# Altium PCB main.PcbDoc
Units mm, origin at the board's own origin, x right, y up, seen from the top; angles counter-clockwise.
Board outline 40.73 x 35.43 mm, 4 copper layers (Top Layer, POWER, GND, Bottom Layer), stack 0.603 mm thick; 29 components, 23 nets, 113 pads, 10 vias.
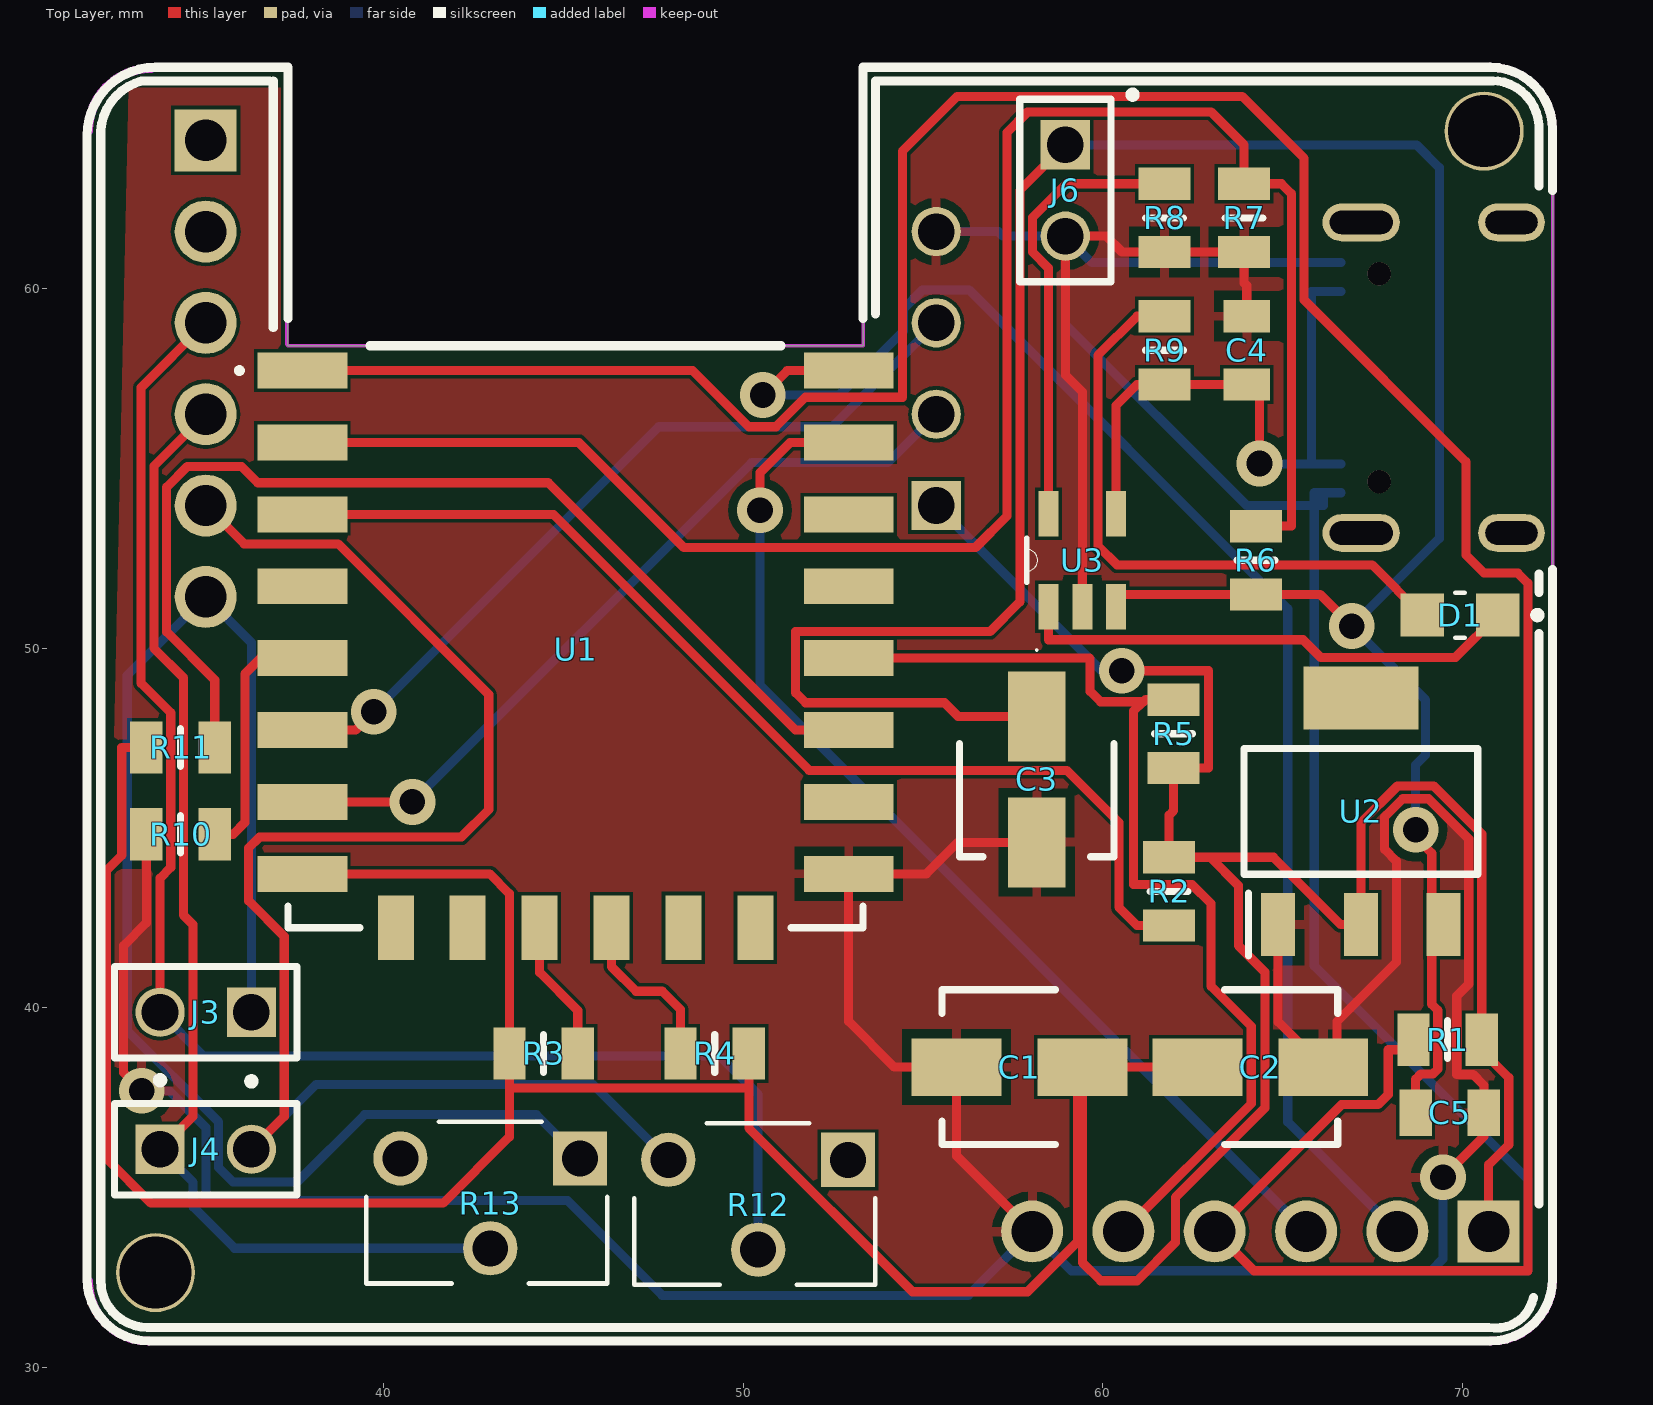
[diagram p0: Top Layer view]
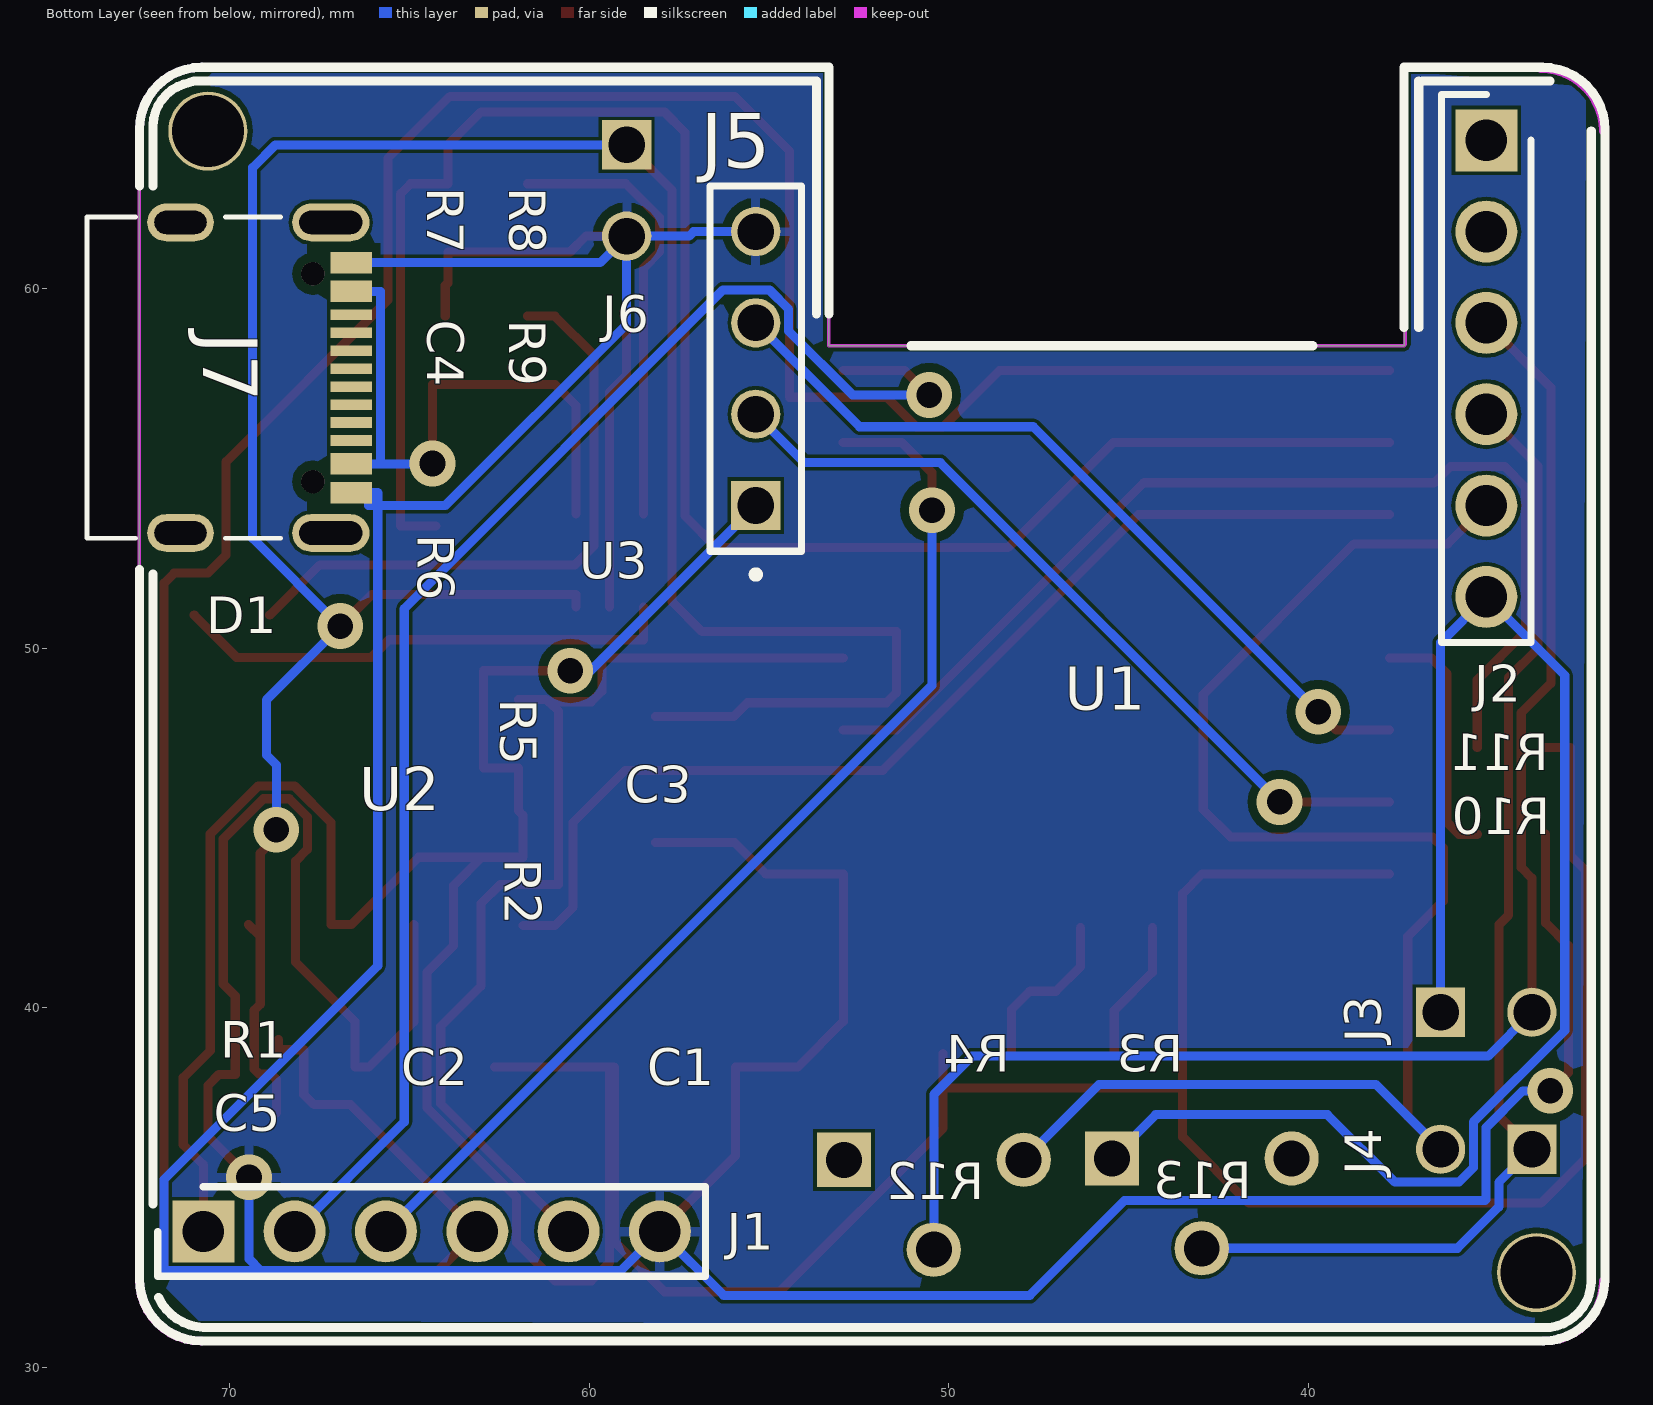
[diagram p1: Bottom Layer view, seen from below]
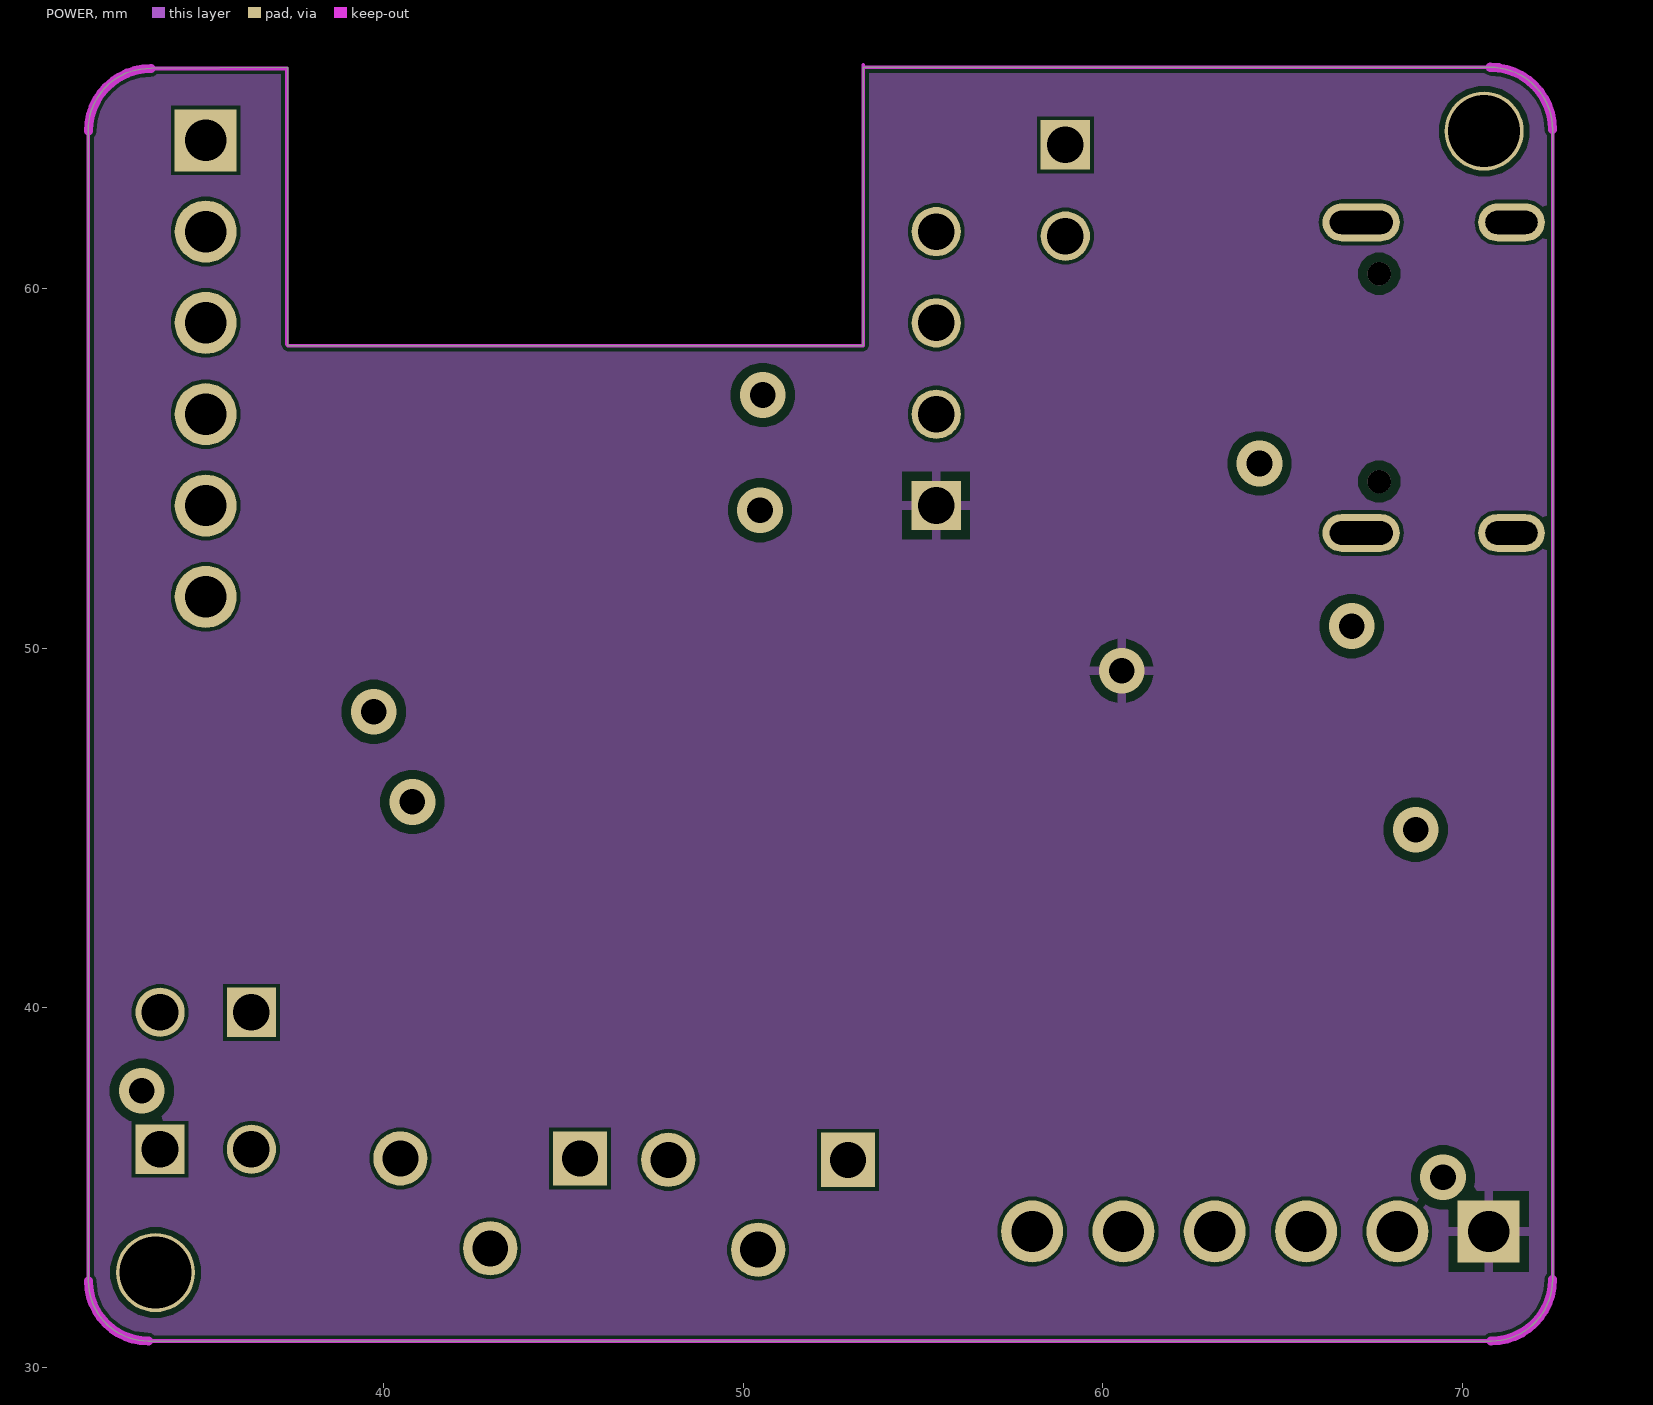
[diagram p2: POWER]
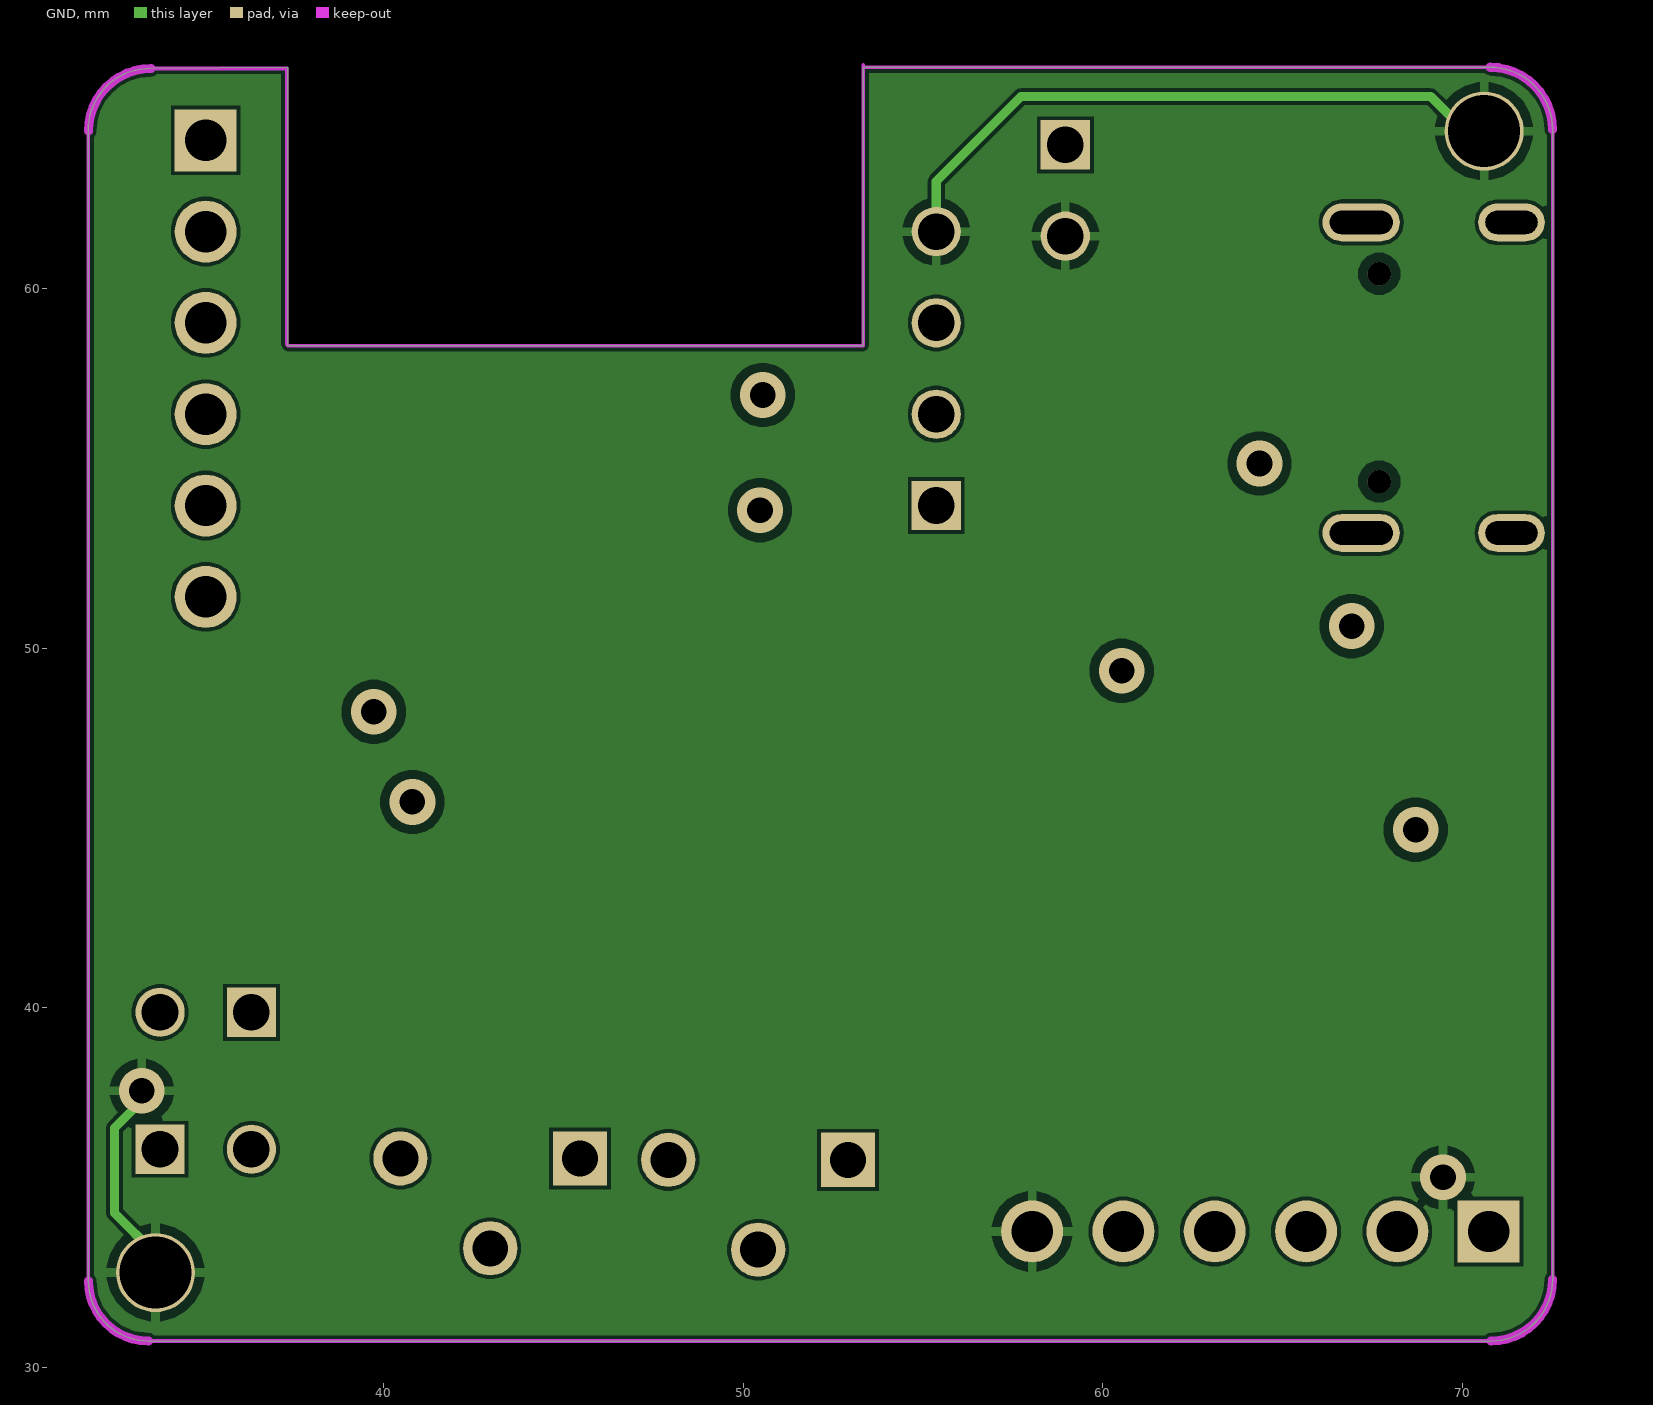
[diagram p3: GND]
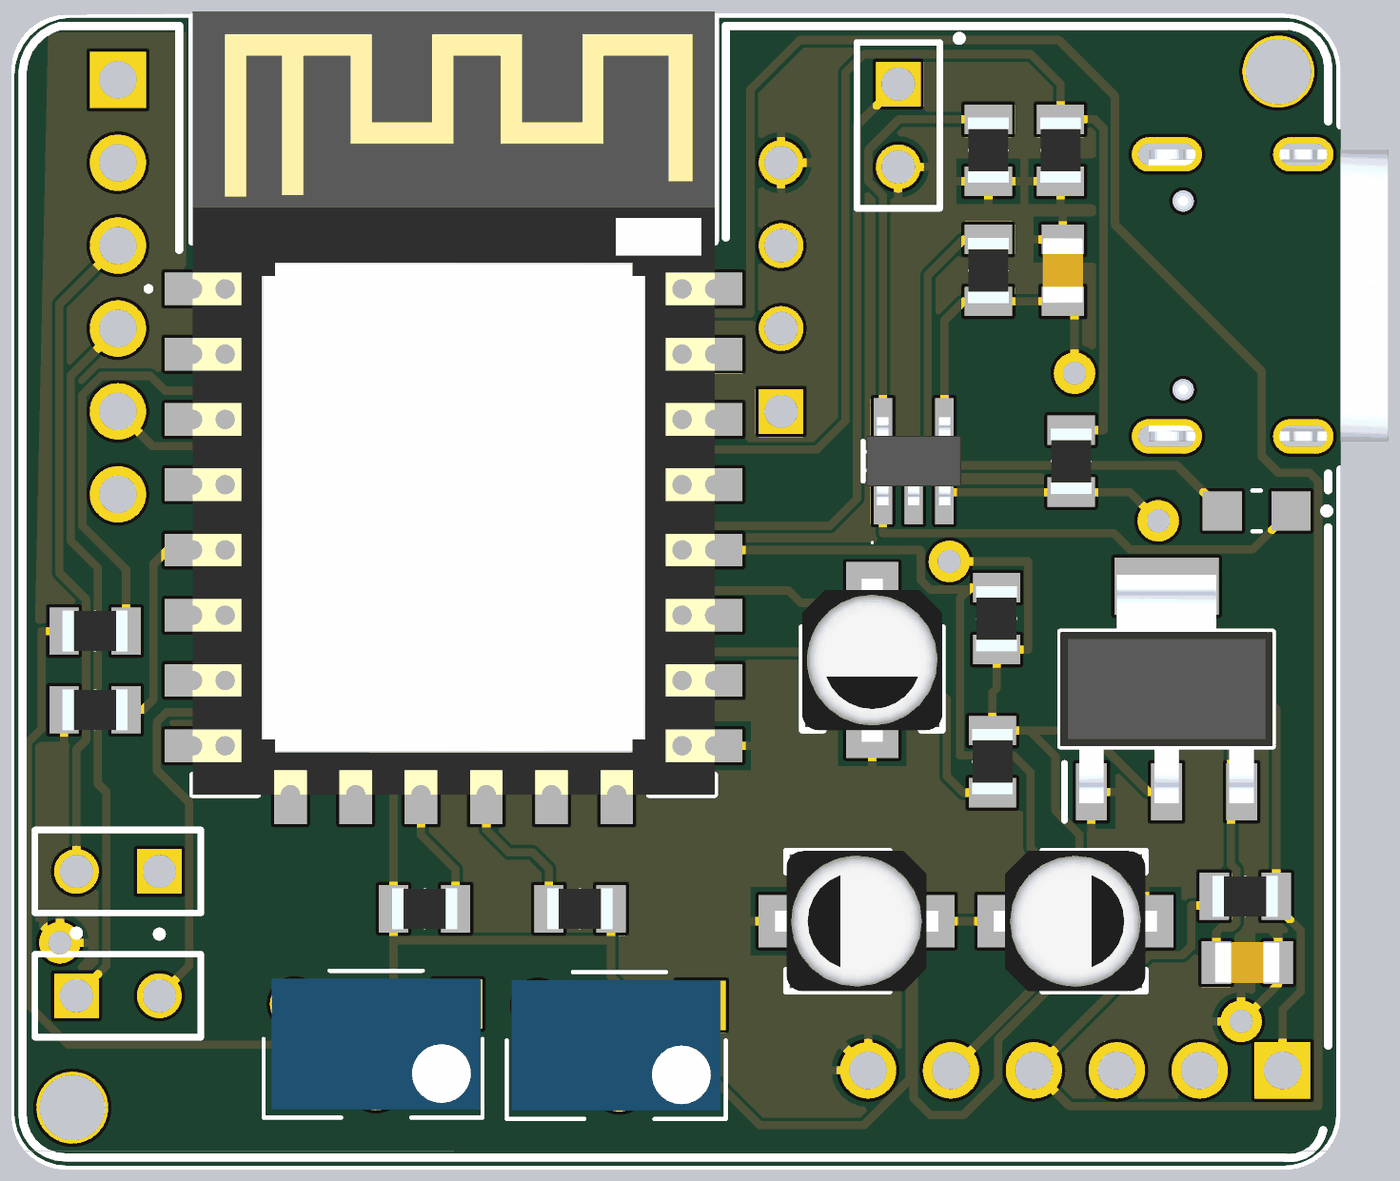
[diagram p4: 3D render of the assembled board from above, using the file's embedded part models]

## Layer stack, top to bottom
Top Solder: solder mask 0.0102, Solder Resist, Dk 3.5
Top Layer: signal copper 0.0356
Dielectric 2: prepreg 0.0711, PP-006, Dk 4.1
POWER: signal copper 0.035
Dielectric 1: dielectric 0.32, FR-4, Dk 4.8
GND: signal copper 0.035
Dielectric 3: prepreg 0.0711, PP-006, Dk 4.1
Bottom Layer: signal copper 0.0356
Bottom Solder: solder mask 0.0102, Solder Resist, Dk 3.5

## Board outline
31.787,32.405 31.787,64.389 cw(c33.488,64.431) 33.53,66.132 37.338,66.167 37.338,58.42 53.34,58.42 53.34,66.167 70.783,66.167 cw(c70.783,64.433) 72.517,64.433 72.517,32.446 cw(c70.805,32.446) 70.805,30.734 33.458,30.734 cw(c33.458,32.405)

## Design rules (kind name [scope] priority, off if disabled: settings)
Clearance Clearance_1 [All] p1: gap=0.1 ignorepadtopadclearanceinfootprint=FALSE except(0.254: Via-Via Via-Fill Via-Poly Via-Region Via-Hole Fill-Fill Fill-Poly Fill-Region Fill-Hole Poly-Poly Poly-Region Poly-Hole Region-Region Region-Hole Hole-Hole)
Clearance Clearance_1 [(ExistsOnLayer('POWER') Or ExistsOnLayer('GND')) vs (ExistsOnLayer('POWER') Or ExistsOnLayer('GND'))] p2: gap=0.254 ignorepadtopadclearanceinfootprint=FALSE sourcerule=38 cellrowname=All cellrowtype=0 cellcolname=All cellcoltype=0 innerlayers=TRUE
Clearance Clearance_2 [(ExistsOnLayer('Top Layer') Or ExistsOnLayer('Bottom Layer')) vs (ExistsOnLayer('Top Layer') Or ExistsOnLayer('Bottom Layer'))] p3: gap=0.254 ignorepadtopadclearanceinfootprint=FALSE sourcerule=38 cellrowname=All cellrowtype=0 cellcolname=All cellcoltype=0 outerlayers=TRUE
Clearance [All] p4: gap=0.254 ignorepadtopadclearanceinfootprint=FALSE ismatrix=TRUE
ComponentClearance ComponentClearance_1 [All] p1: gap=0.254 collisioncheckmode=3 verticalgap=0.254 showdistances=FALSE donotcheckwithout3dbody=TRUE
MinimumSolderMaskSliver [All] p1: minsoldermaskwidth=0.075
PolygonConnect [All] p1: connectstyle=Relief reliefconductorwidth=0.254 reliefentries=4 polygonreliefangle="90 Angle" airgapwidth=0.254
RoutingVias [All] p1: holewidth=0.711 width=1.27 viastyle="Through Hole" minholewidth=0.711 minwidth=1.27 maxholewidth=0.711 maxwidth=1.27
SilkToSolderMaskClearance [IsPad] p1: minsilkscreentomaskgap=0.15 clearancetoexposedcopper=TRUE
SolderMaskExpansion [All] p1: expansion=0.102 istentingtop=FALSE
Width MaxMinWidth_1 [All] p1: maxlimit=1.27 minlimit=0.254 preferedwidth=0.254 midlayer1_maxwidth=0.254 midlayer2_maxwidth=0.254 minimp=50.000000 maximp=50.000000 favimp=50.000000
Width [All] p2: maxlimit=0.254 minlimit=0.254 preferedwidth=0.254
27 further rules are at their usual default settings.

## Components (designator, comment, footprint, x,y, rotation, side; value= is the part's Value field where it differs from the comment)
C1 "10uF" EEE1AA220WR 57.686,38.354 r180 top
C2 "10uF" EEE1AA220WR 64.389,38.354 r0 top
C3 "10uF" EEE1AA220WR 58.166,46.355 r270 top
C4 "4.7uF" WCAP-CSGP_0805_L2W1.25H0.6_Reflow 64.008,58.293 r270 top
C5 "4.7uF" WCAP-CSGP_0805_L2W1.25H0.6_Reflow 69.657,37.084 r180 top
D1 "HSMA-C170" LED_HSMA-C170 69.943,50.927 r180 top
J1 "22-28-4060" HDRV6W66P0X254_1X6_1524X249X838P 70.739,33.782 r180 bottom
J2 "22-28-4060" HDRV6W66P0X254_1X6_1524X249X838P 35.052,64.135 r270 bottom
J3 "SG1" SAMTEC_MTSW-101-08-G-D-250 36.322,39.878 r90 top
J4 "SG2" SAMTEC_MTSW-101-08-G-D-250 33.782,36.068 r270 top
J5 "hx711 in" SAMTEC_TSW-104-16-G-S 55.372,53.975 r90 bottom
J6 "battery" SAMTEC_MTSW-101-08-G-D-250 58.963,64.008 r180 top
J7 "10155435-00021LF" AMPHENOL_10155435-00021LF 71.374,57.531 r270 bottom
R1 "10K" RESC2012X60N 69.596,39.116 r180 top
R2 "10K" RESC2012X60N 61.849,43.241 r270 top
R3 "10K" RESC2012X60N 44.45,38.735 r0 top
R4 "10K" RESC2012X60N 49.21,38.735 r0 top
R5 "10K" RESC2012X60N 61.976,47.625 r270 top
R6 "47k" RESC2012X60N 64.262,52.451 r90 top
R7 "15k'" RESC2012X60N 63.935,61.976 r270 top
R8 "CR0805-JW-202ELF" RESC2012X60N 61.722,61.976 r90 top (schematic designator "R 8")
R9 "470" RESC2012X60N 61.722,58.293 r270 top
R10 "10K" RESC2012X60N 34.351,44.831 r0 top
R11 "10K" RESC2012X60N 34.351,47.244 r180 top
R12 "PV37W501C01B00" TRIM_PV37W501C01B00 50.419,34.544 r180 top
R13 "PV37W501C01B00" TRIM_PV37W501C01B00 42.966,34.584 r180 top
U1 "esp-12f" esp12f 45.339,54.229 r0 top
U2 "TC2117-3.3VDBTR" SOT230P700X180-4N 67.183,45.466 r90 top
U3 "MCP73831T-2ACI/OT" SOT95P280X145-5N 59.436,52.451 r90 top

## Footprints (in the part's own frame and the unit in brackets; to place one, negate y for a bottom-side part, rotate by r counter-clockwise, add the part's x,y. Pads: shape width x height; smd on the part's side, far side on the other; paste and mask are expansions set on the pad)
AMPHENOL_10155435-00021LF [mm]
  rect 0.6x1.15 smd: A1_B12(-3.2,4.745) A4_B9(-2.4,4.745) B1_A12(3.2,4.745) B4_A9(2.4,4.745)
  rect 0.3x1.15 smd: A5(-1.25,4.745) A6(-0.25,4.745) A7(0.25,4.745) A8(1.25,4.745) B5(1.75,4.745) B6(0.75,4.745) B7(-0.75,4.745) B8(-1.75,4.745)
  oval 1.05x2.15 hole 0.65 slot 1.75 at 90 deg: SH1(-4.32,4.18) SH2(4.32,4.18)
  oval 1.05x1.85 hole 0.65 slot 1.45 at 90 deg: SH3(-4.32,0) SH4(4.32,0)
  round 0.65 hole 0.65 unplated: ""(-2.89,3.68) ""(2.89,3.68)
  silkscreen extent -4.47,-2.6 4.47,2.79, body extent -4.47,-2.6 4.47,5, height 3.26
EEE1AA220WR [mm]
  rect 2.5x1.6 smd: 1(-1.75,0) 2(1.75,0)
  silkscreen extent -1,-2.15 2.15,2.15, body extent -2.5,-2.15 2.5,2.15, height 5.78
esp12f [mm]
  rect 2.5x1 smd: 1(-7.6,3.5) 2(-7.6,1.5) 3(-7.6,-0.5) 4(-7.6,-2.5) 5(-7.6,-4.5) 6(-7.6,-6.5) 7(-7.6,-8.5) 8(-7.6,-10.5) 15(7.6,-10.5) 16(7.6,-8.5) 17(7.6,-6.5) 18(7.6,-4.5) 19(7.6,-2.5) 20(7.6,-0.5) 21(7.6,1.5) 22(7.6,3.5)
  rect 1x1.8 smd: 9(-5,-12) 10(-3,-12) 11(-1,-12) 12(1,-12) 13(3,-12) 14(5,-12)
  silkscreen extent -9.4,-12 8,3.55, body extent -8,-12 8,12, height 3.1
HDRV6W66P0X254_1X6_1524X249X838P [mm]
  rect 1.725x1.725 hole 1.15: 1(0,0)
  round 1.725 hole 1.15: 2(2.54,0) 3(5.08,0) 4(7.62,0) 5(10.16,0) 6(12.7,0)
  silkscreen extent -1.27,-1.25 13.97,1.25
LED_HSMA-C170 [mm]
  rect 1.2x1.2 smd: 1(-1.05,0) 2(1.05,0)
  silkscreen extent -2.25,-0.62 0.13,0.62
RESC2012X60N [mm]
  rect 0.9x1.45 smd: 1(-0.95,0) 2(0.95,0)
  silkscreen extent 0,-0.53 0,0.53, body extent -1,-0.63 1,0.63, height 0.6
SAMTEC_MTSW-101-08-G-D-250 [mm]
  rect 1.37x1.37 hole 1.02: 01(0,0)
  round 1.37 hole 1.02: 02(0,2.54)
  silkscreen extent -2.02,-1.27 1.27,3.81
SAMTEC_TSW-104-16-G-S [mm]
  rect 1.37x1.37 hole 1.02: 01(0,0)
  round 1.37 hole 1.02: 02(2.54,0) 03(5.08,0) 04(7.62,0)
  silkscreen extent -2.02,-1.27 8.89,1.27
SOT95P280X145-5N [mil]
  rect 50x22 smd: 1(-51,37) 2(-51,0) 3(-51,-37) 4(51,-37) 5(51,37)
  silkscreen extent -24,49 24,61, body extent -53,-57 53,57, height 57
SOT230P700X180-4N [mm]
  rect 1.75x0.95 smd: 1(-3.15,2.3) 2(-3.15,0) 3(-3.15,-2.3)
  rect 1.75x3.2 smd: 4(3.15,0)
  silkscreen extent -4.02,-3.25 1.75,3.25, body extent -3.5,-3.25 3.5,3.25, height 1.8
TRIM_PV37W501C01B00 [mm]
  rect 1.508x1.508 hole 1: 1(-2.5,-1.23)
  round 1.508 hole 1: 2(0,1.27) 3(2.5,-1.23)
  silkscreen extent -3.26,-2.25 3.45,2.25, body extent -3.1,-2 3.3,2, height 7.9
WCAP-CSGP_0805_L2W1.25H0.6_Reflow [mm] "Ceramic Capacitors, body 2x1.25mm"
  rect 0.9x1.3 smd: 1(-0.95,0) 2(0.95,0)
  body extent -1,-0.63 1,0.63, height 0.6

## Part data
C1 C2 C3: library part EEE-FN1C100R, "Capacitor Polarised", Manufacturer_Name=Panasonic, Mouser Part Number=667-EEE-FN1C100R, Arrow Part Number=EEE-FN1C100R, Arrow Price/Stock=https://www.arrow.com/en/products/eee-fn1c100r/panasonic?region=nac, Datasheet Link=http://industrial.panasonic.com/cdbs/www-data/pdf/RDE0000/RDE0000C1259.pdf, Height=5.5mm, Manufacturer_Part_Number=EEE-FN1C100R, Mouser Price/Stock=https://www.mouser.co.uk/ProductDetail/Panasonic/EEE-FN1C100R?qs=OlC7AqGiEDkM1emDreS51w%3D%3D
C4 C5: library part 885012007049, "WCAP-CSGP Multilayer Ceramic Chip Capacitor, General Purpose, size 0805, NP0, 4.7pF, 50VDC", Capacitance=4.7pF, Capacitance Tolerance=+/-0.5pF, Case/Size Code=0805, Insulation Resistance=10GOhm, Manufacturer="Wurth Elektronik", Operating Temperature Max=125°C, Operating Temperature Min=-55°C, Rated Voltage (DC)=50V, Category="Multilayer Ceramic Chip Capacitors", Ceramic Type=NP0, ComponentLink1Description="Website Link", ComponentLink1URL=https://www.we-online.com/redexpert/article/885012007049?ad, ComponentLink2Description="Datasheet Link", ComponentLink2URL=https://www.we-online.com/redexpert/spec/885012007049?ad, Height=0.6mm, Length=2mm, Manufacturer Part Number=885012007049, Match Code=WCAP-CSGP, Mount="Surface Mount", Packaging="Tape and Reel", Q Factor=494, Technical Reference=NP008054R7D050DFCT10000, Width=1.25mm
D1 J7: Package=None, Availability=Unavailable, Price=None
  D1: MP=HSMA-C170
  J7: MP=10155435-00021LF
J1 J2: library part CMP-002-00071-1, "Connector", Manufacturer_Name=Molex, Mouser Part Number=538-22-28-4060, Datasheet Link=https://www.molex.com/pdm_docs/sd/022284060_sd.pdf, Design Item ID=22-28-4060, Height=8.38mm, Manufacturer_Part_Number=22-28-4060, Mouser Price/Stock=https://www.mouser.co.uk/ProductDetail/Molex/22-28-4060?qs=d9fIA1aNikSACgwI0d%252BTOw%3D%3D, Source=SamacSys.SchLib
J3 J4 J6: library part MTSW-101-08-G-D-250, Package=None, Availability=Unavailable, MP=MTSW-101-08-G-D-250, Price=None
J5: library part TSW-104-16-G-S, Package=None, Availability=Unavailable, MP=TSW-104-16-G-S, Price=None
R1 R2 R3 R4 R5 R6 R7 R9 R10 R11: library part CHP0805-FX-1002ELF, "Resistor", Manufacturer_Name=Bourns, Mouser Part Number=652-CHP0805FX1002ELF, Datasheet Link=https://ms.componentsearchengine.com/Datasheets/1/CHP0805-FX-1002ELF.pdf, Height=0.6mm, Manufacturer_Part_Number=CHP0805-FX-1002ELF, Mouser Price/Stock=https://www.mouser.co.uk/ProductDetail/Bourns/CHP0805-FX-1002ELF?qs=lc2O%252BfHJPVaDI6gsPdDtfw%3D%3D
R8: "Resistor", Manufacturer_Name=Bourns, Mouser Part Number=652-CR0805JW-202ELF, Arrow Part Number=CR0805-JW-202ELF, Arrow Price/Stock=https://www.arrow.com/en/products/cr0805-jw-202elf/bourns, Datasheet Link=https://www.bourns.com/pdfs/chpreztr.pdf, Height=0.6mm, Manufacturer_Part_Number=CR0805-JW-202ELF, Mouser Price/Stock=https://www.mouser.co.uk/ProductDetail/Bourns/CR0805-JW-202ELF?qs=wL7NMIHXUPnyGz%2Fa3t%2FGQg%3D%3D
R12 R13: "500 Ohms 0.25W, 1/4W PC Pins Through Hole Trimmer Potentiometer Cermet 12.0 Turn Top Adjustment", Package="PV37W Bourns", Availability="In Stock", Check_prices=https://www.snapeda.com/parts/PV37W501C01B00/Bourns/view-part/?ref=eda, MF=Bourns, MP=PV37W501C01B00, Price=None, Purchase-URL=https://pricing.snapeda.com/search/part/PV37W501C01B00/?ref=eda, SnapEDA_Link=https://www.snapeda.com/parts/PV37W501C01B00/Bourns/view-part/?ref=snap
U1: "Integrated Circuit", Manufacturer_Name=Ai-Thinker, Datasheet Link=https://docs.ai-thinker.com/_media/esp8266/docs/esp-12f_product_specification_en.pdf, Height=3.1mm, Manufacturer_Part_Number=esp-12f
U2: "Power Supply", Manufacturer_Name=Microchip, Mouser Part Number=579-TC2117-3.3VDBTR, Arrow Part Number=TC2117-3.3VDBTR, Arrow Price/Stock=https://www.arrow.com/en/products/tc2117-3.3vdbtr/microchip-technology?utm_currency=USD&region=nac, Datasheet Link=https://componentsearchengine.com/Datasheets/2/TC2117-3.3VDBTR.pdf, Height=1.8mm, Manufacturer_Part_Number=TC2117-3.3VDBTR, Mouser Price/Stock=https://www.mouser.co.uk/ProductDetail/Microchip-Technology/TC2117-3.3VDBTR?qs=AF%252BffTaPb30YsLOBvxArLw%3D%3D
U3: "Charger IC Lithium Ion/Polymer SOT-23-5", Package="SOT-23 Microchip", Availability="In Stock", Check_prices=https://www.snapeda.com/parts/MCP73831T-2ACI/OT/Microchip/view-part/?ref=eda, MF=Microchip, MP=MCP73831T-2ACI/OT, Price=None, Purchase-URL=https://pricing.snapeda.com/search/part/MCP73831T-2ACI/OT/?ref=eda, SnapEDA_Link=https://www.snapeda.com/parts/MCP73831T-2ACI/OT/Microchip/view-part/?ref=snap

## Free pads (board coordinates)
  round 2.2 hole 2: 1(70.612,64.389) 2(33.655,32.639)

## Via types
v1: diameter 1.27, hole 0.711, Top Layer to Bottom Layer, 10 vias

## Nets (pads, with @x,y where several pads share a name; then routed paths per layer and width w, separated by ;. In a path a pad name is that pad's centre, name@x,y a point inside that pad or via, vN(x,y) a via of type N, cw(c..) or ccw(c..) an arc to the next point about the centre after c; other vN are vias at no path point)
A+: J2.3 J3.02 R12.2 | length 42.3
  Top Layer w0.254: J3.02 33.782,43.612 34.078,43.908 34.078,48.209 33.254,49.033 33.254,57.257 J2.3
  Bottom Layer w0.254: J3.02 35.001,38.659 49.352,38.659 50.419,37.592 R12.2
A-: J2.4 J4.01 R13.2 | length 32.6
  Top Layer w0.254: J4.01 34.696,36.982 34.696,42.316 34.432,42.581 34.432,49.185 33.608,50.008 33.608,55.071 J2.4
  Bottom Layer w0.254: J4.01 34.702,35.148 34.702,34.468 35.856,33.314 R13.2
Bat_level: R6.2 R7.1 U1.2 | length 51.8
  Top Layer w0.254: U1.2 45.431,55.729 48.353,52.807 56.464,52.807 57.343,53.686 57.343,64.354 57.912,64.922 63.017,64.922 63.932,64.008 63.932,62.926 R7.1 64.973,62.926 65.251,62.648 65.251,53.401 R6.2
DT: J5.03 U1.6 | length 22.3
  Top Layer w0.254: U1.6 39.218,47.729 v1(39.726,48.237)
  Bottom Layer w0.254: v1(39.726,48.237) 47.654,56.165 52.482,56.165 J5.03
E+: J2.6 J3.01 R13.1 | length 41.4
  Bottom Layer w0.254: J3.01 36.322,50.165 J2.6 32.868,49.251 32.868,39.37 35.41,36.828 35.41,35.558 35.814,35.154 37.592,35.154 39.472,37.033 44.247,37.033 R13.1
E-: J2.5 J4.02 R12.3 | length 42.8
  Top Layer w0.254: J2.5 36.119,52.908 38.735,52.908 42.926,48.717 42.926,45.517 42.164,44.755 36.551,44.755 36.246,44.45 36.246,42.977 37.236,41.986 37.236,36.982 J4.02
  Bottom Layer w0.254: J4.02 38.125,37.871 45.822,37.871 R12.3
FLASH: J1.5 R5.1 U1.18 | length 28.8
  Top Layer w0.254: U1.18 59.633,49.729 59.654,49.708 59.654,48.806 59.944,48.516 61.135,48.516 ; J1.5 64.135,37.338 64.135,39.486 63.017,40.603 63.017,42.901 62.484,43.434 60.858,43.434 60.858,48.26 61.135,48.516 ; R5.1 61.199,48.575 ; 61.135,48.516 61.199,48.575 ; 61.135,48.516 61.139,48.516 61.199,48.575
GND: C1.2 C2.2 C3.2 C4.1 C5.1 J1.6 J5.04 J6.02 J7.A1_B12 J7.B1_A12 pad.1 pad.2 R7.2 R8.1 R10.1 U1.15 U2.1 U3.2 | length 188.4
  Top Layer w0.254: v1(33.274,37.694) 32.766,38.202 32.766,41.732 33.401,42.367 R10.1 ; J1.6 55.936,35.885 C1.2 54.204,38.354 52.934,39.624 52.934,43.729 U1.15 55.093,43.729 55.969,44.605 C3.2 ; U3.2 59.436,57.135 58.963,57.607 J6.02 60.096,61.468 60.538,61.026 R8.1 R7.2 63.935,60.17 64.008,60.096 C4.1 ; U2.1 64.883,39.61 C2.2 66.523,38.354 66.523,39.624 68.174,41.275 68.174,44.083 67.845,44.412 67.845,45.315 68.35,45.82 69.064,45.82 70.185,44.699 70.185,40.665 69.85,40.33 69.85,38.151 70.302,38.151 70.607,37.846 C5.1 70.607,36.424 v1(69.469,35.286)
  GND w0.254: v1(33.274,37.694) 33.274,37.419 32.512,36.657 32.512,34.298 33.655,33.155 pad.2 ; J5.04 55.372,62.992 57.734,65.354 69.12,65.354 70.085,64.389 pad.1
  Bottom Layer w0.254: v1(33.274,37.694) 34.036,37.694 35.056,36.674 35.056,34.673 35.083,34.646 45.11,34.646 47.752,32.004 56.261,32.004 J1.6 59.131,32.69 69.139,32.69 ; J5.04 57.099,61.595 57.226,61.468 J6.02 ; J7.B1_A12 J7.B1_A12@66.142,54.331 ; J7.A1_B12 59.7,60.731 J6.02 ; v1(69.469,35.286) 69.469,33.02 69.139,32.69 ; J6.02 58.963,59.02 64.008,53.975 65.888,53.975 ; 65.888,53.975 66.142,53.975 J7.B1_A12@66.142,54.331 ; 65.888,53.975 65.888,54.331 J7.B1_A12@66.142,54.331 ; 65.888,53.975 65.888,41.173 71.831,35.23 71.831,32.69 69.139,32.69
NetC3_1: C3.1 C5.2 J6.01 R6.1 U2.3 U3.3 | length 75.9
  Top Layer w0.254: C3.1 58.166,48.108 55.982,48.108 55.601,48.489 51.74,48.489 51.46,48.768 51.46,50.47 56.871,50.47 57.697,51.297 57.697,62.742 J6.01 ; U3.3 60.376,51.501 R6.1 66.05,51.501 v1(66.929,50.622) ; C5.2 68.707,38.015 68.856,38.164 69.19,38.164 69.323,38.297 69.323,39.935 69.156,40.102 U2.3@69.156,41.989 ; v1(68.707,44.958) 68.707,44.75 69.156,44.301 U2.3@69.156,41.989 ; U2.3 U2.3@69.156,41.989
  Bottom Layer w0.254: J6.01 68.732,64.008 69.367,63.373 69.367,53.061 v1(66.929,50.622) 68.986,48.565 68.986,47.039 68.707,46.759 v1(68.707,44.958)
NetD1_1: D1.1 U3.1 | length 14.1
  Top Layer w0.254: U3.1 58.496,50.241 65.575,50.241 66.069,49.747 69.813,49.747 D1.1
NetD1_2: D1.2 R9.1 | length 17.4
  Top Layer w0.254: R9.1 60.96,59.243 59.868,58.151 59.868,52.857 60.401,52.324 67.496,52.324 D1.2
NetR2_2: R2.2 U1.3 | length 30.2
  Top Layer w0.254: U1.3 44.721,53.729 51.841,46.609 59.004,46.609 60.452,45.161 60.452,42.799 60.96,42.291 R2.2
NetR3_2: R3.2 U1.11 | length 3.9
  Top Layer w0.254: U1.11 44.339,40.99 45.4,39.929 R3.2
NetR4_1: R4.1 U1.12 | length 4.7
  Top Layer w0.254: U1.12 46.339,41.148 47.025,40.462 47.752,40.462 48.26,39.954 R4.1
NetR10_2: R10.2 U1.5 | length 6.9
  Top Layer w0.254: R10.2 35.814,44.831 36.144,45.161 36.144,49.297 36.576,49.729 U1.5
NetR11_1: R11.1 U1.17 | length 30
  Top Layer w0.254: R11.1 35.301,49.121 33.962,50.46 33.962,54.483 34.544,55.065 36.045,55.065 36.5,54.61 44.579,54.61 51.46,47.729 U1.17
"NetR 8_2": R8.2 U3.5 | length 12.5
  Top Layer w0.254: U3.5 58.496,60.579 58.051,61.024 58.051,61.988 58.989,62.926 R8.2
RST: J1.4 R1.2 U1.1 | length 88.9
  Top Layer w0.254: U1.1 48.595,57.729 50.159,56.165 50.91,56.165 51.732,56.987 54.432,56.987 54.432,63.83 55.956,65.354 63.881,65.354 65.605,63.63 65.605,59.693 70.104,55.194 70.104,52.603 70.612,52.095 71.552,52.095 71.831,51.816 71.831,32.69 64.211,32.69 J1.4 66.65,37.313 67.666,37.313 67.945,37.592 67.945,38.837 68.646,38.837 R1.2
RX: J1.3 U1.21 | length 30.2
  Top Layer w0.254: v1(50.47,53.848) 50.47,54.891 51.308,55.729 U1.21
  Bottom Layer w0.254: v1(50.47,53.848) 50.47,48.971 J1.3
SCK: J5.02 U1.7 | length 22.1
  Top Layer w0.254: U1.7 v1(40.801,45.729)
  Bottom Layer w0.254: v1(40.801,45.729) 50.241,55.169 54.026,55.169 J5.02
TX: J1.2 U1.22 | length 41.1
  Top Layer w0.254: v1(50.546,57.048) 51.227,57.729 U1.22
  Bottom Layer w0.254: v1(50.546,57.048) 52.68,57.048 54.458,58.826 54.458,59.436 54.991,59.969 56.286,59.969 65.151,51.105 65.151,36.83 J1.2
"USB power": C4.2 J7.A4_B9 J7.B4_A9 R9.2 U3.4 | length 17.3
  Top Layer w0.254: U3.4 60.376,56.759 60.96,57.343 R9.2 C4.2 64.364,57.343 v1(64.364,55.143)
  Bottom Layer w0.254: v1(64.364,55.143) 64.376,55.131 65.811,55.131 ; J7.B4_A9 65.811,55.131 ; J7.A4_B9 65.811,59.931 65.811,55.131
VCC: C1.1 C2.1 J1.1 J5.01 R1.1 R2.1 R3.1 R4.2 R5.2 R11.2 U1.8 U2.2 | length 127.7
  Top Layer w0.254: R11.2 32.715,47.244 32.715,44.247 32.283,43.815 32.283,35.814 33.528,34.569 41.656,34.569 43.5,36.413 43.5,37.77 ; U1.8 42.951,43.729 43.5,43.18 R3.1 43.5,37.77 ; R4.2 50.16,37.77 ; v1(60.528,49.378) 62.941,49.378 62.941,46.675 R5.2 61.976,45.491 61.849,45.364 R2.1 62.992,44.191 ; C2.1 C1.1 ; J1.1 70.739,35.636 71.298,36.195 71.298,38.059 70.546,38.811 R1.1 70.546,44.839 69.211,46.174 68.203,46.174 67.183,45.154 U2.2 66.625,42.316 64.75,44.191 62.992,44.191 ; 43.5,37.77 50.16,37.77 ; 50.16,37.77 50.16,36.657 54.712,32.106 57.912,32.106 59.309,33.503 59.309,38.354 C1.1 ; C1.1 59.436,32.918 59.944,32.41 60.96,32.41 62.027,33.477 62.027,34.729 64.516,37.218 64.516,40.996 63.779,41.732 63.779,43.404 62.992,44.191
  Bottom Layer w0.254: J5.01 59.969,49.378 v1(60.528,49.378)
pads on no net: J2.1 J2.2 J7. J7.A5 J7.A6 J7.A7 J7.A8 J7.B5 J7.B6 J7.B7 J7.B8 J7.SH1 J7.SH2 J7.SH3 J7.SH4 R12.1 R13.3 U1.4 U1.9 U1.10 U1.13 U1.14 U1.16 U1.19 U1.20 U2.4

## Polygon pours and split planes (outlines as drawn)
GND on Top Layer "GND_L01_P002" (solid, remove dead copper, pour order 2): 37.338,65.595 37.338,58.42 53.34,58.42 53.34,65.913 53.467,66.04 72.39,66.04 72.016,31.235 32.265,31.235 32.265,36.322 32.913,65.595
GND on Bottom Layer "GND_L04_P001" (solid, remove dead copper, pour order 1): 70.864,31.3 72.39,32.826 72.39,64.262 70.612,66.04 53.467,66.04 53.467,58.293 37.211,58.293 37.211,66.04 32.284,65.633 32.389,31.12
GND on GND "GND_L03_P003" (solid, remove dead copper, pour order 3): 30.861,68.961 30.988,68.834 30.988,29.464 74.676,29.464 76.454,31.242 76.2,31.496 76.2,68.072
VCC on POWER "VCC_L02_P004" (solid, remove dead copper, pour order 4): 30.607,68.326 30.607,29.21 31.242,28.575 31.877,29.21 75.057,29.21 75.057,68.072 75.438,68.453

## Keep-outs
Keep-Out Layer:
  lines w0.1: 31.787,32.405 31.787,64.389 ; 33.458,30.734 70.805,30.734 ; 33.53,66.132 37.303,66.132 37.303,58.456 37.339,58.42 53.339,58.42 53.34,58.421 53.34,66.167 ; 53.34,66.228 53.34,66.167 ; 70.783,66.167 53.34,66.167 ; 72.517,32.446 72.517,64.433
  lines w0.254: 31.787,32.405 ccw(c33.458,32.405) 33.458,30.734 ; 31.787,64.389 cw(c33.53,64.389) 33.53,66.132 ; 70.783,66.167 cw(c70.783,64.433) 72.517,64.433 ; 70.805,30.734 ccw(c70.805,32.446) 72.517,32.446

## Silkscreen, mask and mechanical layers (free items; w line width, h text height)
Top Overlay:
  lines w0.254: 36.83,65.786 33.274,65.786 ccw(c33.663,64.302) 32.131,64.389 32.131,32.416 ccw(c33.432,32.416) 33.432,31.115 70.739,31.115 ccw(c70.946,32.153) 71.984,31.947 ; 36.93,58.928 36.93,65.786 ; 37.338,59.182 37.338,66.167 33.655,66.167 ccw(c33.655,64.262) 31.75,64.262 31.75,32.468 ccw(c33.484,32.468) 33.484,30.734 70.783,30.734 ccw(c70.783,32.468) 72.517,32.468 72.517,52.197 ; 39.624,58.42 51.054,58.42 ; 53.34,59.182 53.34,66.167 70.783,66.167 cw(c70.783,64.433) 72.517,64.433 72.517,62.738 ; 53.68,59.309 53.68,65.786 70.866,65.786 ; 70.993,65.786 cw(c70.812,64.472) 72.136,64.557 72.136,62.865 ; 72.136,34.544 72.136,50.419 ; 72.136,51.562 72.136,52.07
Bottom Overlay:
  lines w0.254: 32.131,64.389 32.131,32.385 ccw(c33.453,32.425) 33.274,31.115 70.739,31.115 ccw(c70.687,32.541) 71.984,31.947 ; 33.274,65.786 36.83,65.786 ; 36.93,58.928 36.93,65.786 ; 37.338,58.928 37.338,66.167 33.484,66.167 ccw(c33.484,64.433) 31.75,64.433 31.75,32.405 ccw(c33.486,32.471) 33.458,30.734 70.783,30.734 ccw(c70.783,32.468) 72.517,32.468 72.517,52.197 ; 39.878,58.42 51.054,58.42 ; 53.34,59.309 53.34,66.167 70.783,66.167 cw(c70.783,64.433) 72.517,64.433 72.517,62.865 ; 53.68,59.309 53.68,65.786 70.993,65.786 71.282,65.696 cw(c70.918,64.533) 72.136,64.557 72.136,62.865 ; 72.136,34.544 72.136,52.07
Mechanical 1:
  the board outline again, w0.254
Top Designator:
  lines w0.254: 37.338,58.42 37.338,66.167 ; 53.34,58.42 53.34,66.167